# EAGLE board test_AT91SAM7S64 (EAGLE 5.06)
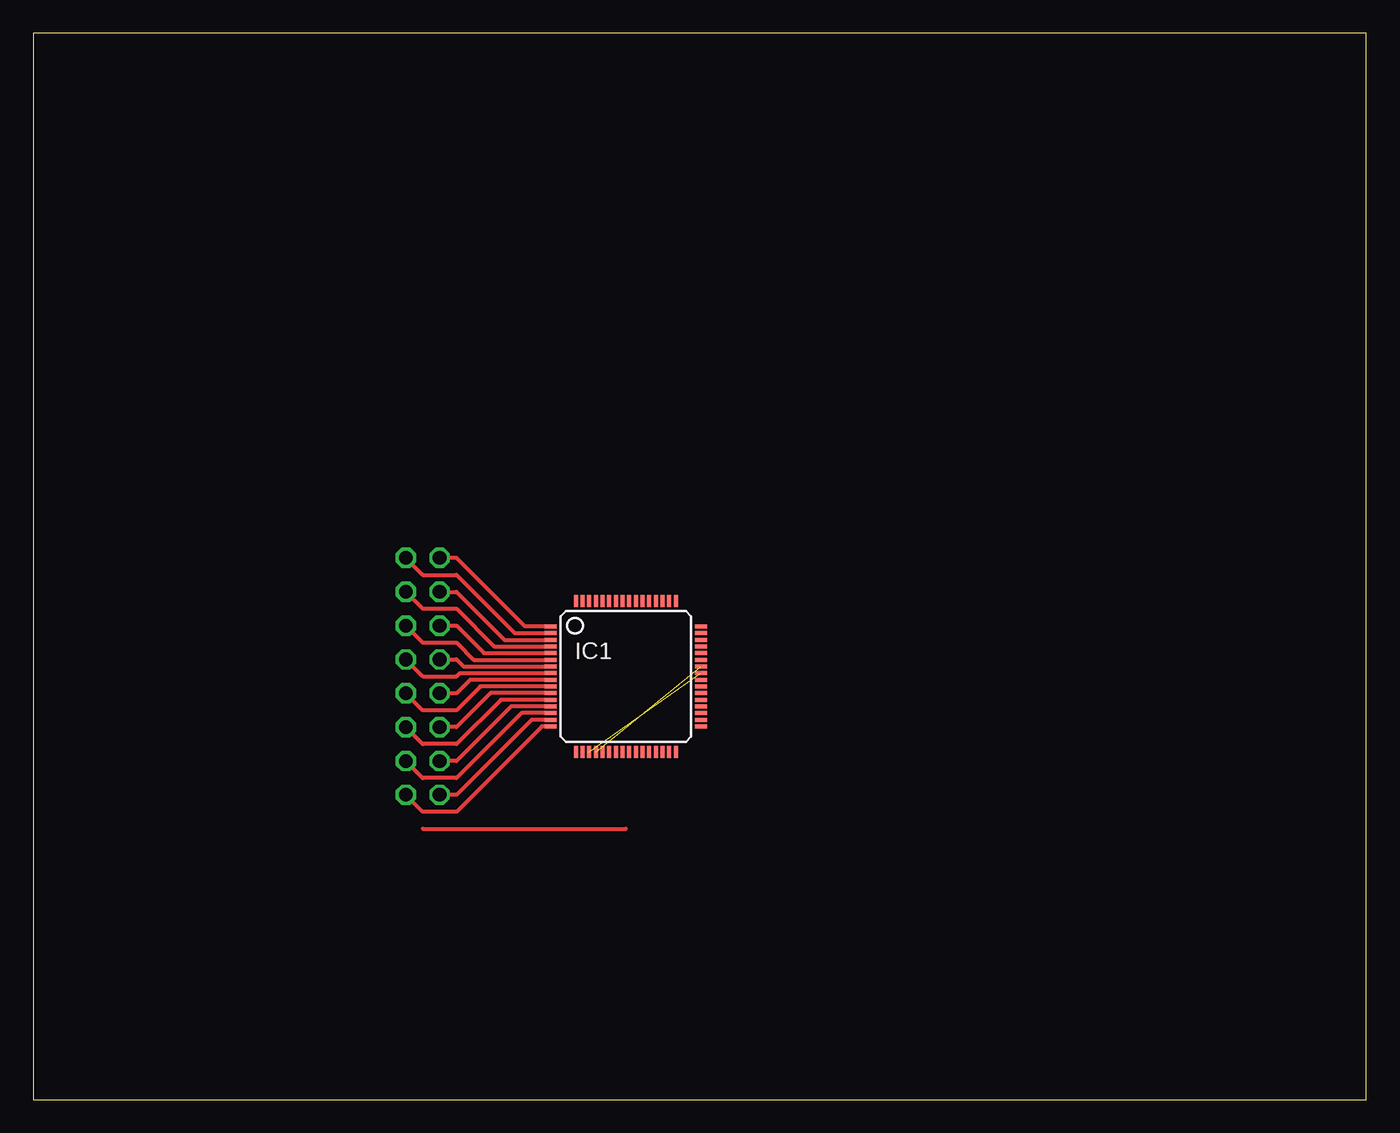
[diagram p0: board, top side]
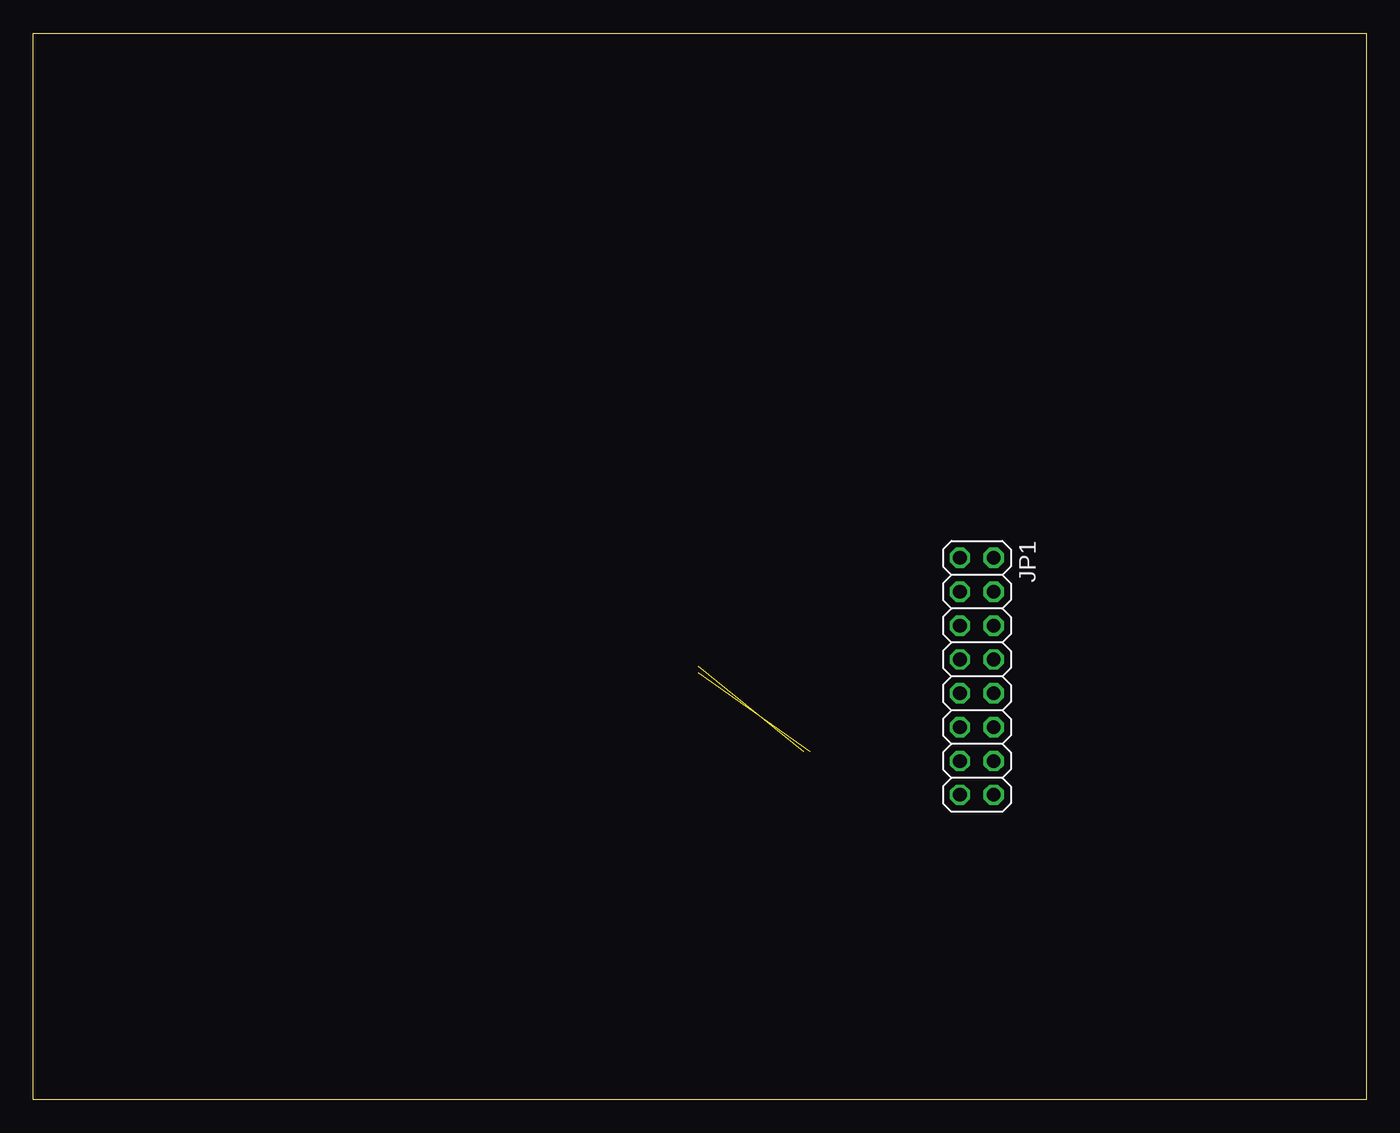
[diagram p1: board, bottom side, seen from below]

Size 100 x 80 mm. Coordinates in mm from the lower left corner, seen from the top.
Outline: 0,0 100,0 100,80 0,80 0,0
Copper layers (1*16): Top 0.035mm / dielectric 1.5mm / Bottom 0.035mm
Design rules "default": minimum track width 10mil, minimum drill 24mil, track to track 8mil, track to pad 8mil, pad to pad 8mil, via to via 8mil, smd to smd 8mil, copper to edge 40mil, drill to drill 8mil, minimum pad ring 10mil, minimum via ring 8mil, stop-mask expansion 4mil, vias tented up to drill 0mil, thermal gap 10mil

## Footprints (pad centres in the part's own frame; a part is rotated, then mirrored left to right if it is on the bottom)
LQFP-ST-64-2 = smd 0.9 x 0.3: 1 -5.65,3.75; 2 -5.65,3.25; 3 -5.65,2.75; 4 -5.65,2.25; 5 -5.65,1.75; 6 -5.65,1.25; 7 -5.65,0.75; 8 -5.65,0.25; 9 -5.65,-0.25; 10 -5.65,-0.75; 11 -5.65,-1.25; 12 -5.65,-1.75; 13 -5.65,-2.25; 14 -5.65,-2.75; 15 -5.65,-3.25; 16 -5.65,-3.75; 33 5.65,-3.75; 34 5.65,-3.25; 35 5.65,-2.75; 36 5.65,-2.25; 37 5.65,-1.75; 38 5.65,-1.25; 39 5.65,-0.75; 40 5.65,-0.25; 41 5.65,0.25; 42 5.65,0.75; 43 5.65,1.25; 44 5.65,1.75; 45 5.65,2.25; 46 5.65,2.75; 47 5.65,3.25; 48 5.65,3.75 | smd 0.3 x 0.9: 17 -3.75,-5.65; 18 -3.25,-5.65; 19 -2.75,-5.65; 20 -2.25,-5.65; 21 -1.75,-5.65; 22 -1.25,-5.65; 23 -0.75,-5.65; 24 -0.25,-5.65; 25 0.25,-5.65; 26 0.75,-5.65; 27 1.25,-5.65; 28 1.75,-5.65; 29 2.25,-5.65; 30 2.75,-5.65; 31 3.25,-5.65; 32 3.75,-5.65; 49 3.75,5.65; 50 3.25,5.65; 51 2.75,5.65; 52 2.25,5.65; 53 1.75,5.65; 54 1.25,5.65; 55 0.75,5.65; 56 0.25,5.65; 57 -0.25,5.65; 58 -0.75,5.65; 59 -1.25,5.65; 60 -1.75,5.65; 61 -2.25,5.65; 62 -2.75,5.65; 63 -3.25,5.65; 64 -3.75,5.65
2X08 = drill 1.016 octagon: 1 -8.89,-1.27; 2 -8.89,1.27; 3 -6.35,-1.27; 4 -6.35,1.27; 5 -3.81,-1.27; 6 -3.81,1.27; 7 -1.27,-1.27; 8 -1.27,1.27; 9 1.27,-1.27; 10 1.27,1.27; 11 3.81,-1.27; 12 3.81,1.27; 13 6.35,-1.27; 14 6.35,1.27; 15 8.89,-1.27; 16 8.89,1.27

## Placement (x,y rotation side)
IC1  ADUC7024BSTZ62  [LQFP-ST-64-2]  44.45,31.75 0 top
JP1  [2X08]  29.21,31.75 270 bottom

## Library data of the parts
IC1 JP1 = teste_AT91SAM7S64

## Nets
1: IC1.1 JP1.1
2: IC1.2 JP1.2
3: IC1.3 JP1.3
4: IC1.4 JP1.4
5: IC1.5 JP1.5
6: IC1.6 JP1.6
7: IC1.7 JP1.7
8: IC1.8 JP1.8
9: IC1.9 JP1.9
10: IC1.10 JP1.10
11: IC1.11 JP1.11
12: IC1.12 JP1.12
13: IC1.13 JP1.13
14: IC1.14 JP1.14
15: IC1.15 JP1.15
16: IC1.16 JP1.16
AGND: IC1.58
AVDD: IC1.59
DACGND: IC1.57
DACVDD: IC1.60
DGND: IC1.22
IOGND: IC1.19 IC1.41
IOVDD: IC1.20 IC1.42

## Tracks (layer width: path | path; a pad name or v marks a point on that pad's centre or on a via)
1
  Top 0.305: IC1.1 36.89,35.5 31.75,40.64 JP1.1
2
  Top 0.305: IC1.2 36.12,35 31.75,39.37 29.21,39.37 JP1.2
3
  Top 0.305: IC1.3 35.35,34.5 31.75,38.1 JP1.3
4
  Top 0.305: IC1.4 34.58,34 31.75,36.83 29.21,36.83 JP1.4
5
  Top 0.305: IC1.5 33.81,33.5 31.75,35.56 JP1.5
6
  Top 0.305: IC1.6 33.04,33 31.75,34.29 29.21,34.29 JP1.6
7
  Top 0.305: IC1.7 32.27,32.5 31.75,33.02 JP1.7
8
  Top 0.305: IC1.8 32,32 31.75,31.75 29.21,31.75 JP1.8
9
  Top 0.305: IC1.9 32.77,31.5 31.75,30.48 JP1.9
10
  Top 0.305: IC1.10 33.54,31 31.75,29.21 29.21,29.21 JP1.10
11
  Top 0.305: IC1.11 34.31,30.5 31.75,27.94 JP1.11
12
  Top 0.305: IC1.12 35.08,30 31.75,26.67 29.21,26.67 JP1.12
13
  Top 0.305: IC1.13 35.85,29.5 31.75,25.4 JP1.13
14
  Top 0.305: IC1.14 36.62,29 31.75,24.13 29.21,24.13 JP1.14
15
  Top 0.305: IC1.15 37.39,28.5 31.75,22.86 JP1.15
16
  Top 0.305: IC1.16 38.16,28 31.75,21.59 29.21,21.59 JP1.16
IOGND  (1 unrouted)
IOVDD  (1 unrouted)
N$1
  Top 0.305: 29.21,20.32 44.45,20.32